# Altium PCB WES0012-02_ASCII.PcbDoc
Units mil, origin at the board's own origin, x right, y up, seen from the top; angles counter-clockwise.
Board outline 1614.17 x 1751.97 mil, 4 copper layers (Top, Inner2, Inner3, Bottom), stack 35.4 mil thick; 42 components, 32 nets, 189 pads, 344 vias.
Unrouted connection lines stored in the file: 322.
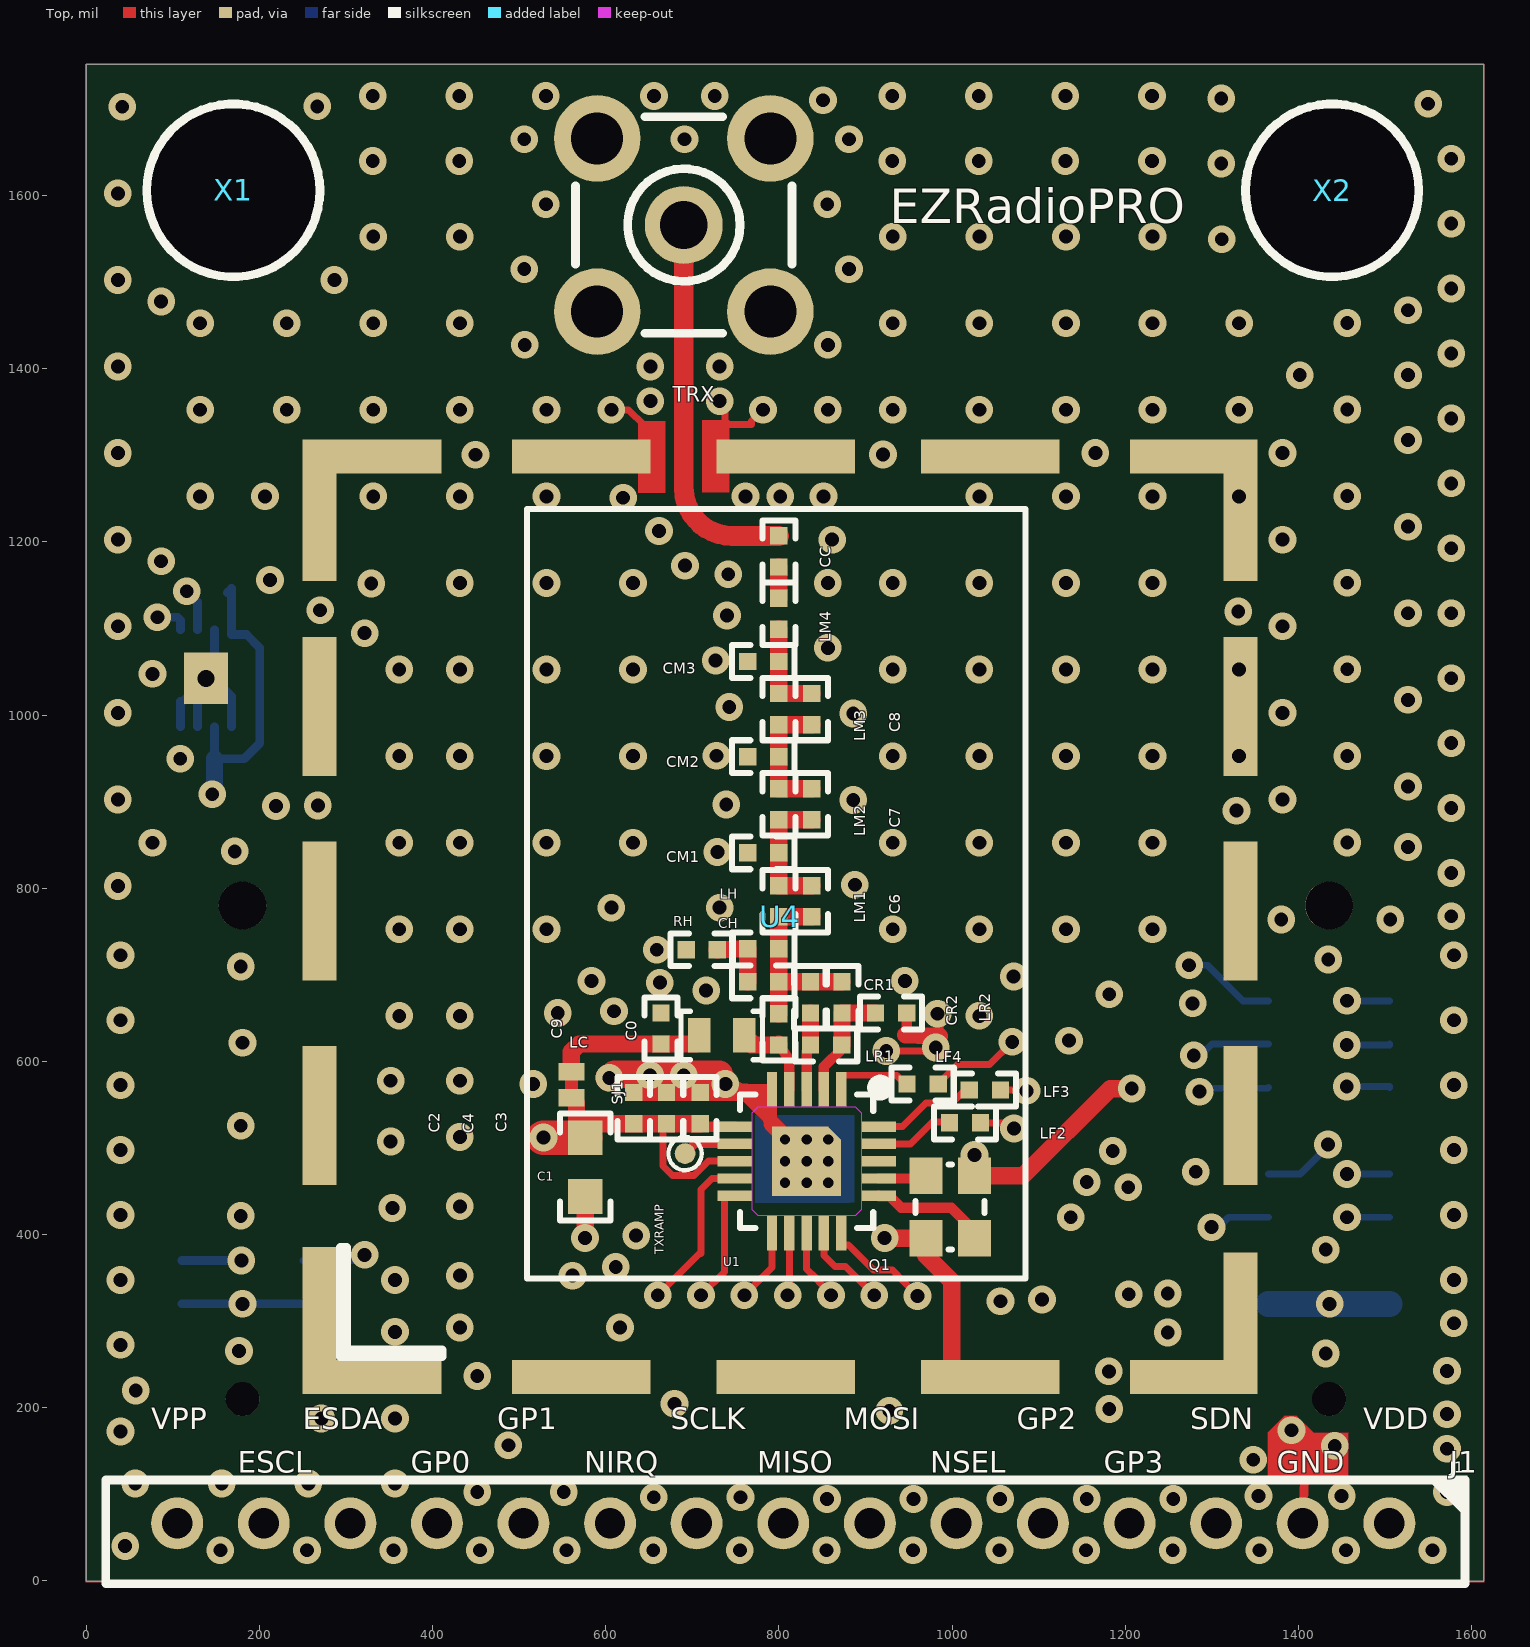
[diagram p0: Top view]
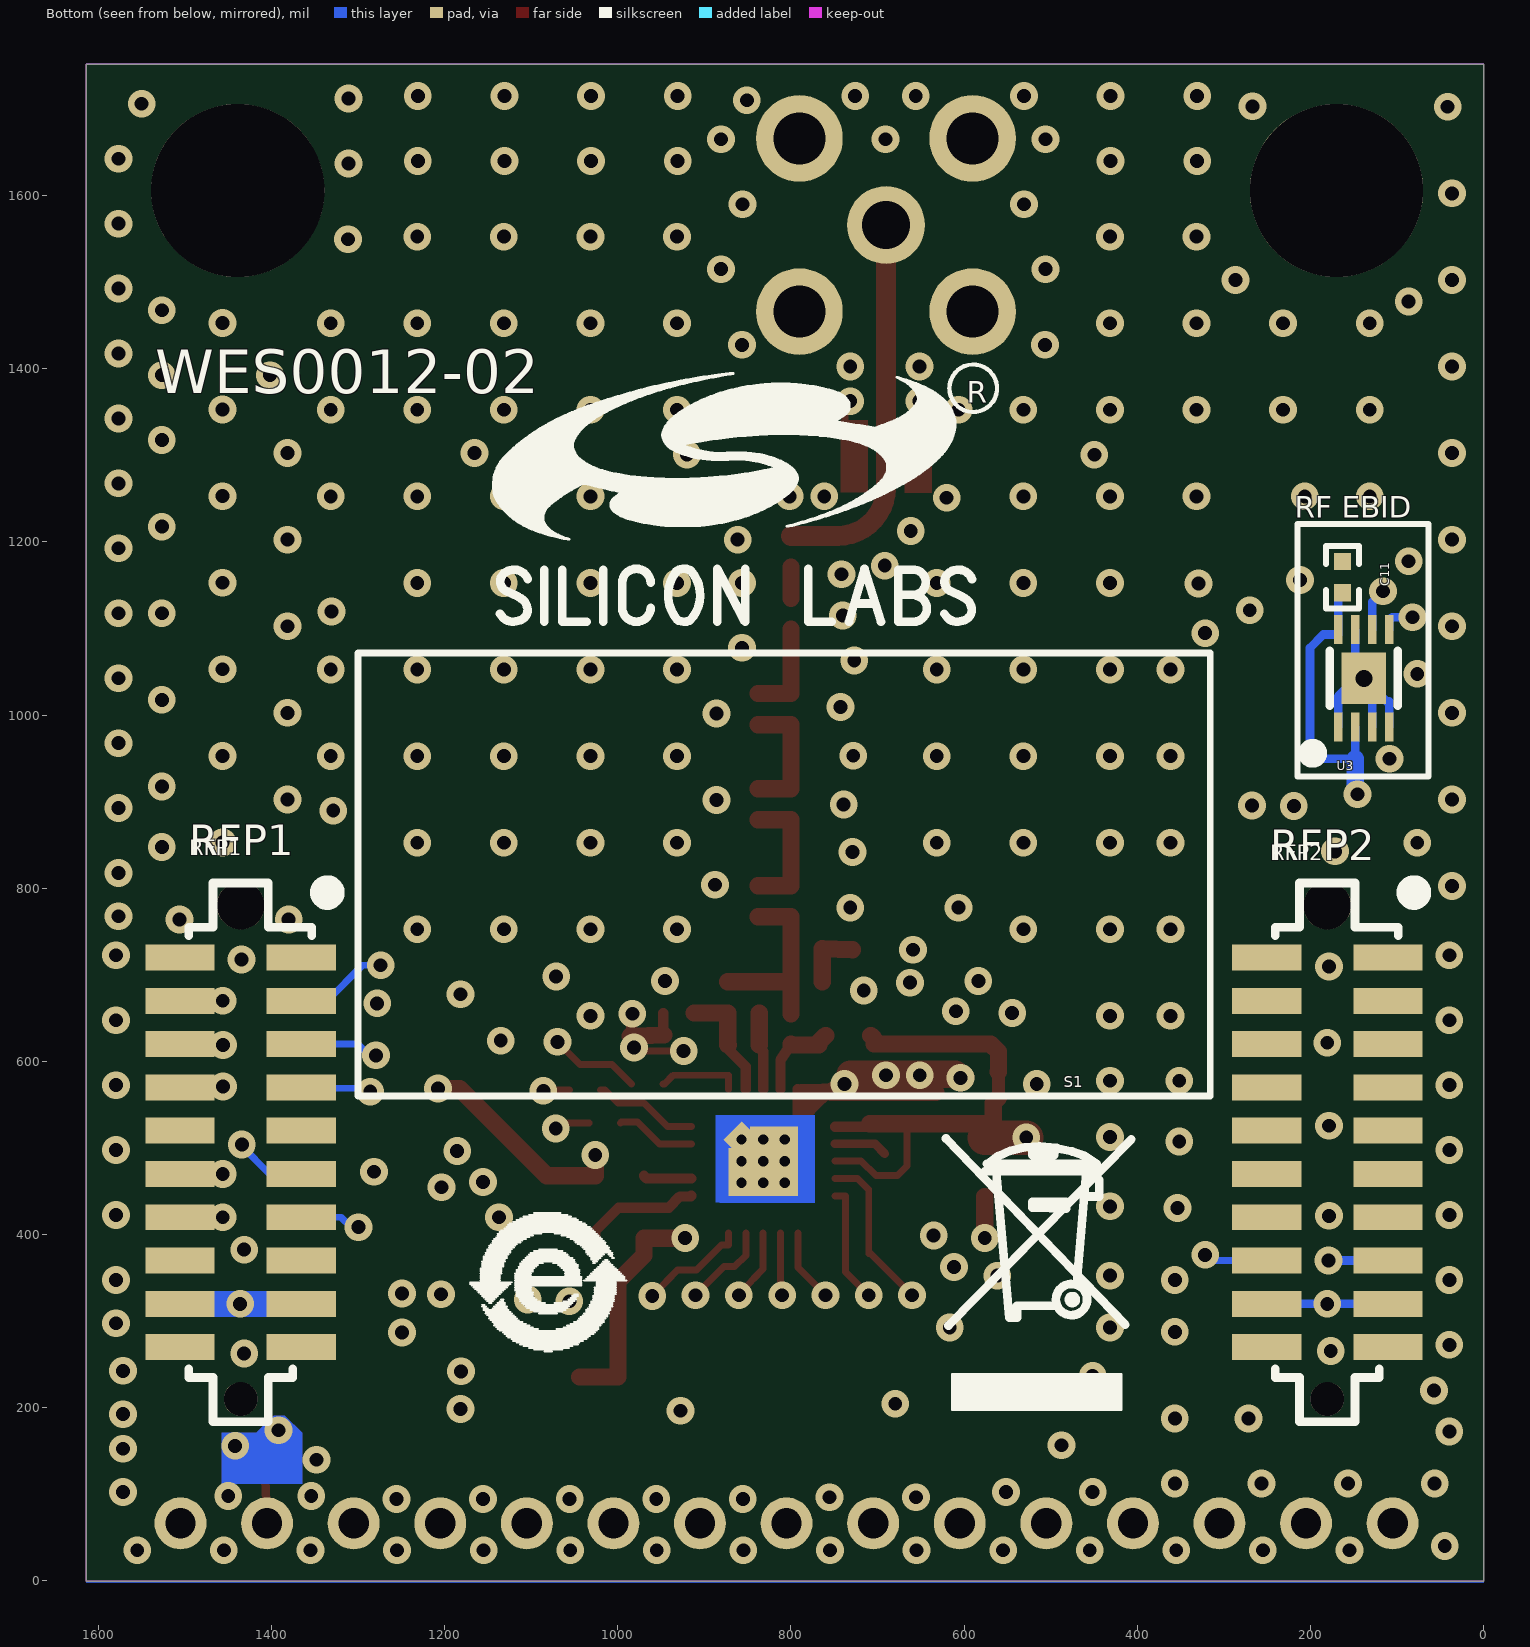
[diagram p1: Bottom view, seen from below]
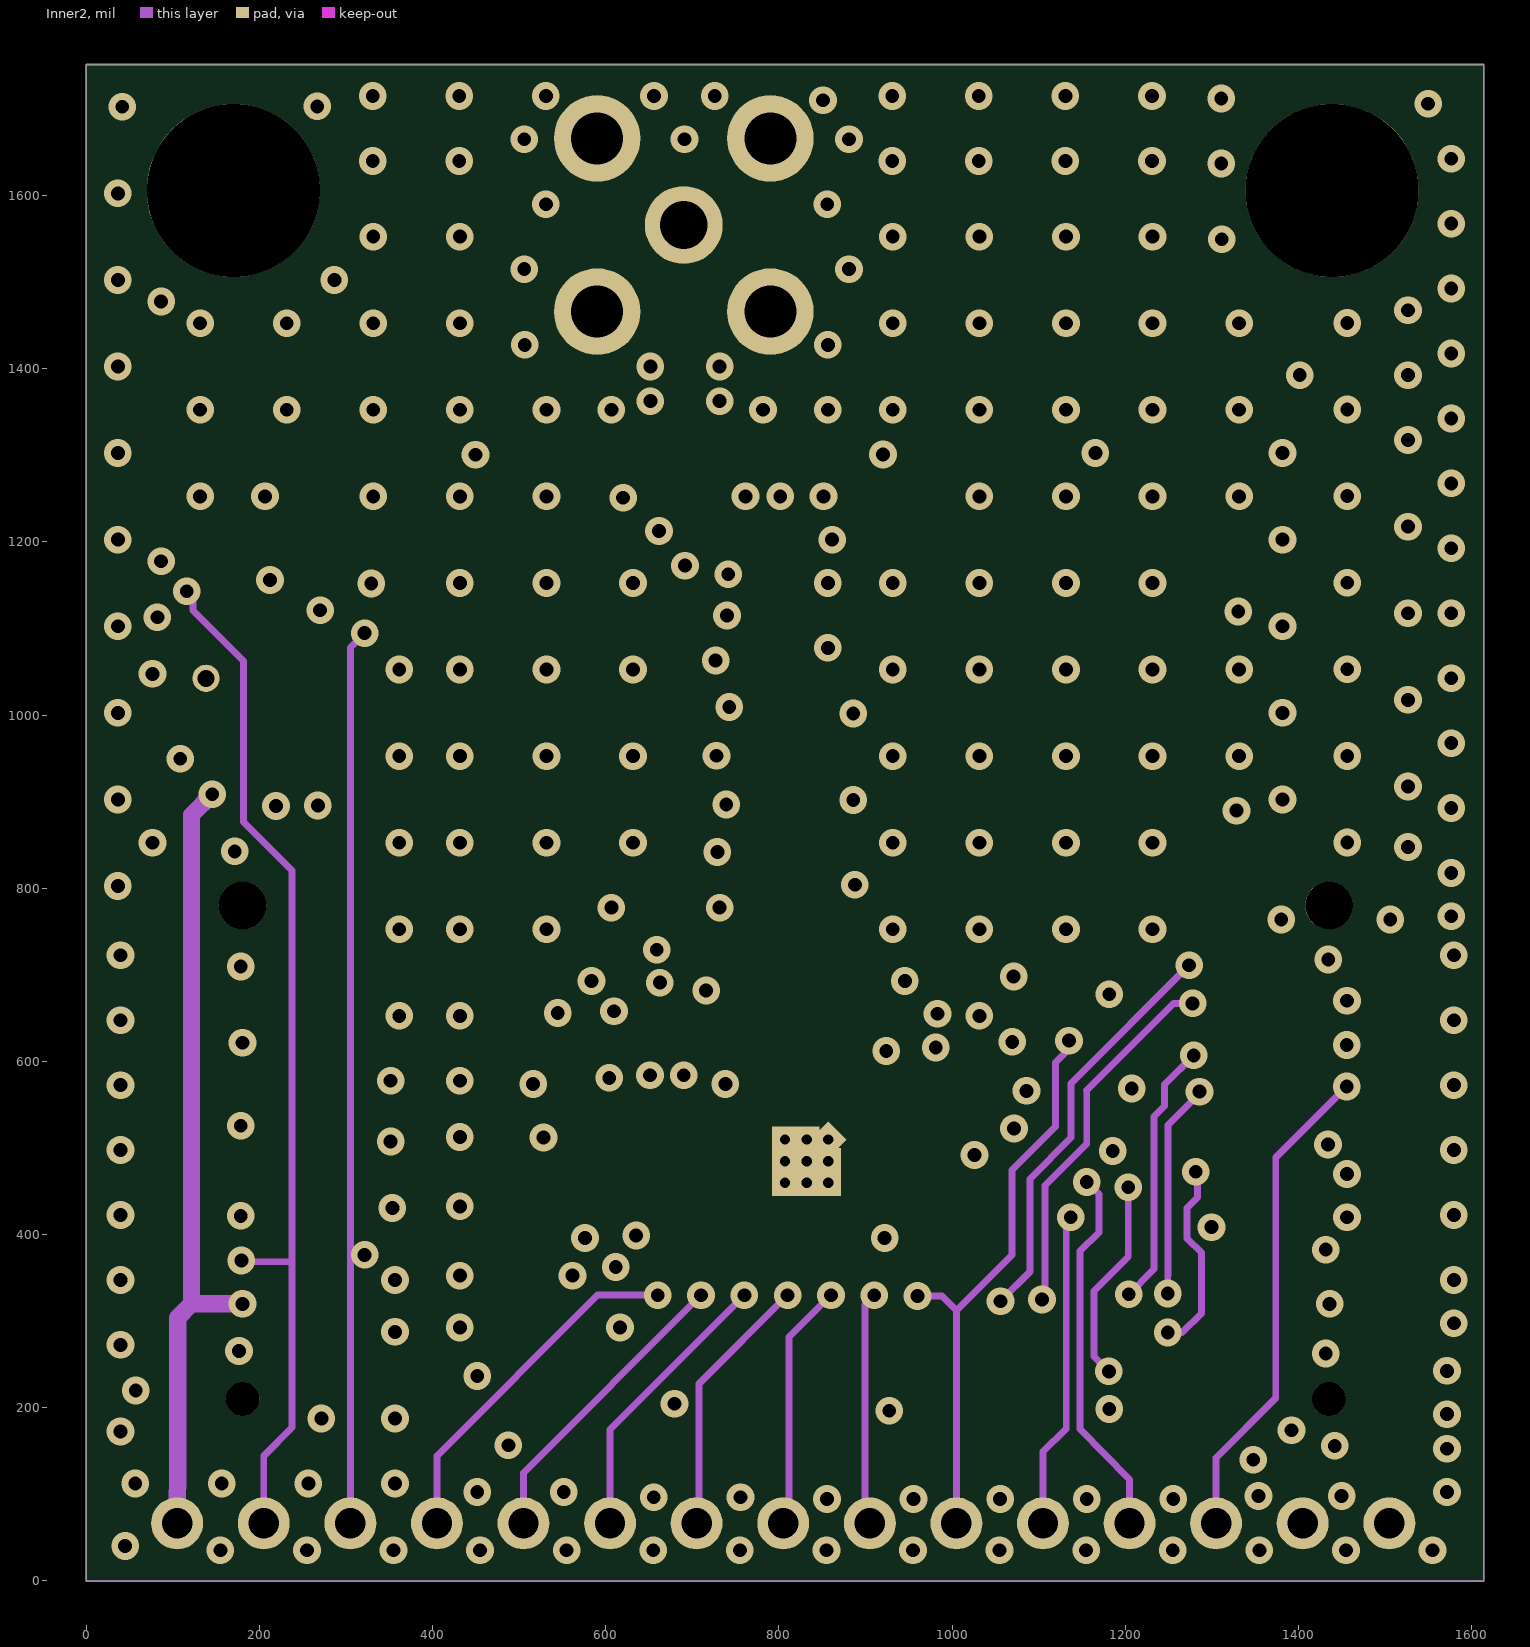
[diagram p2: Inner2]
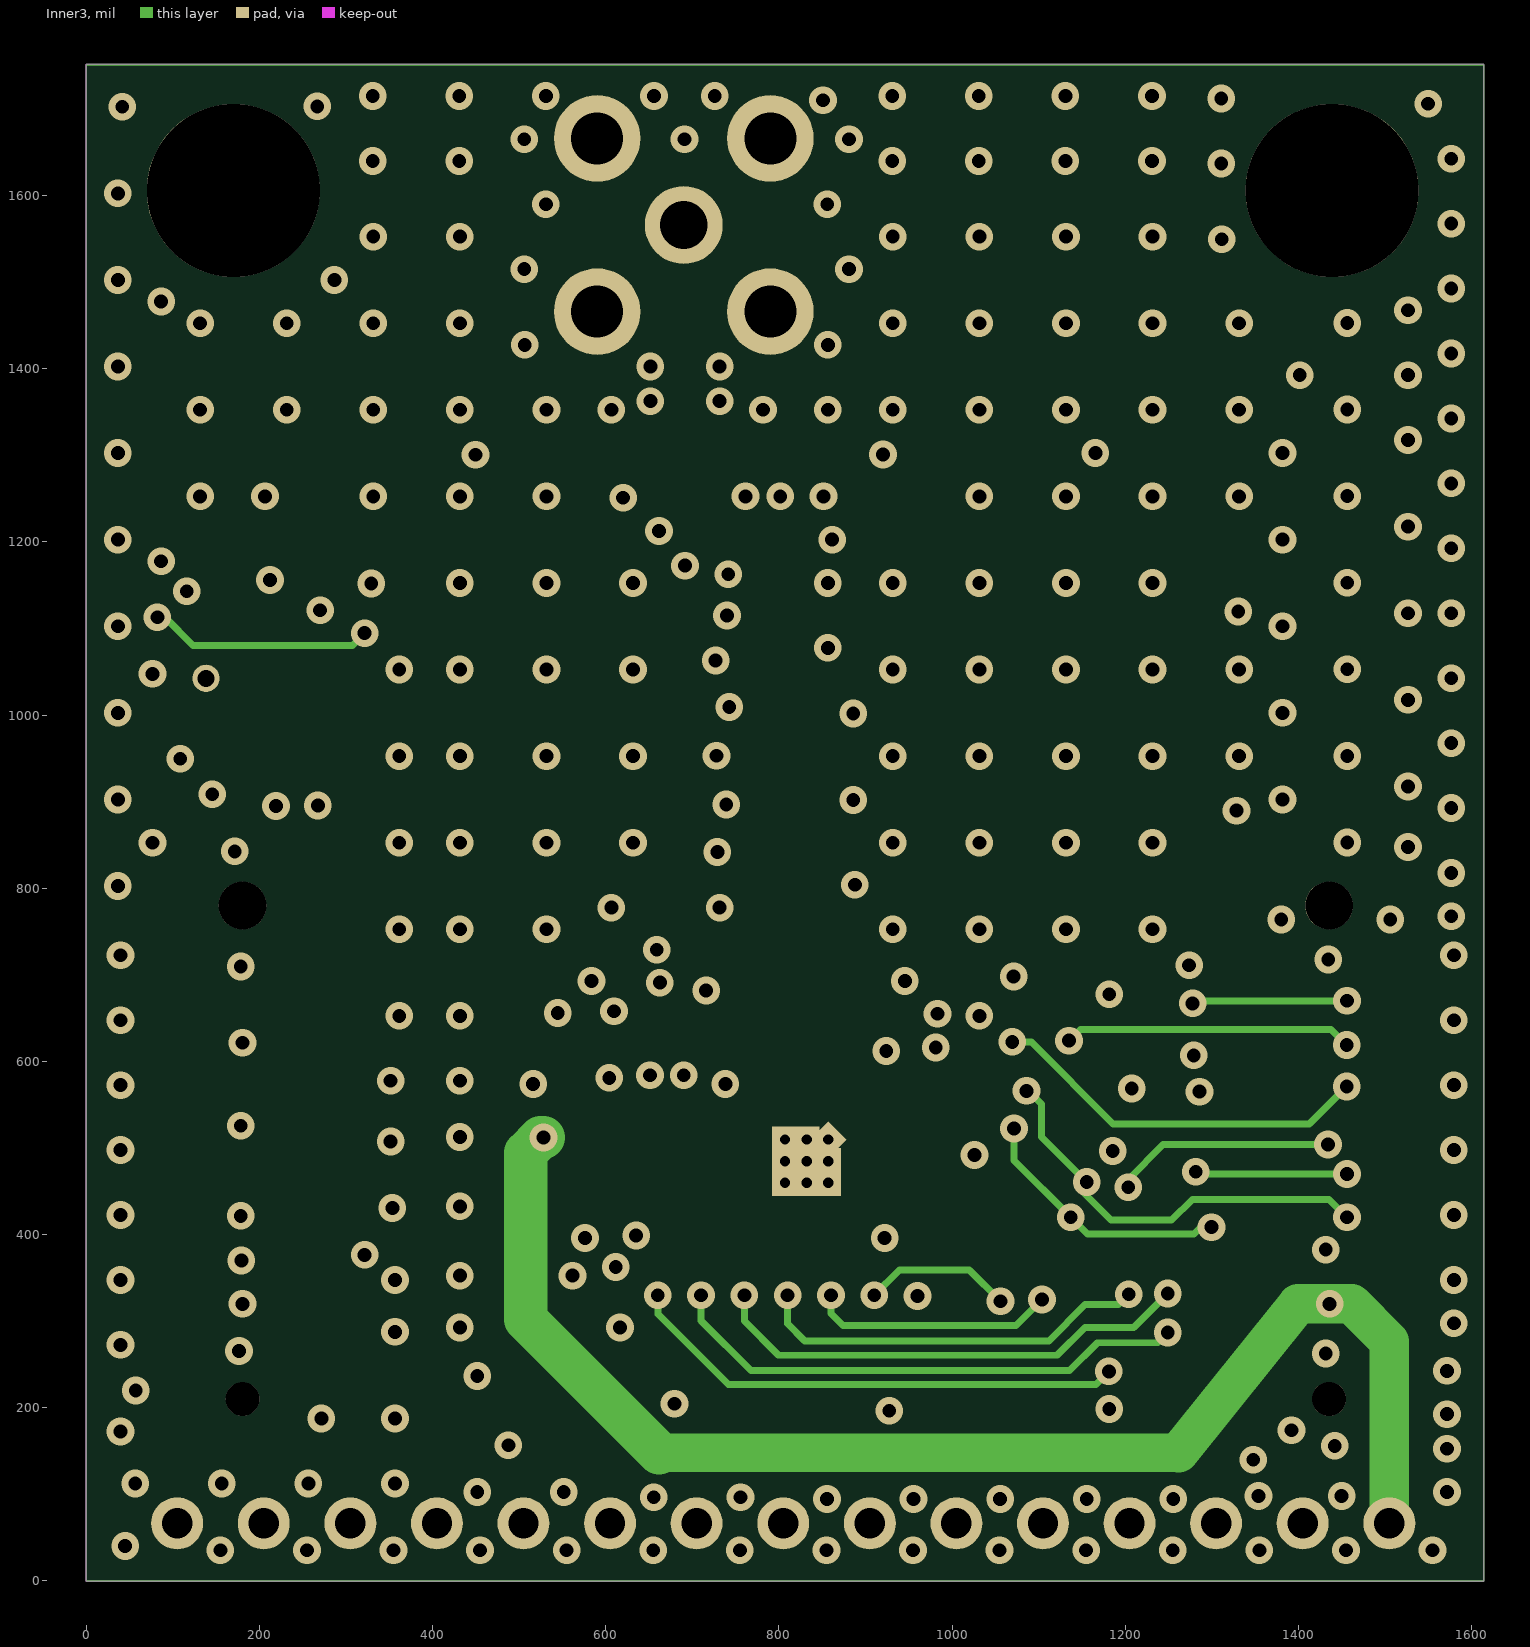
[diagram p3: Inner3]

## Layer stack, top to bottom
Solder Mask Top: solder mask 0.4, Solder Resist, Dk 3.5
Top: signal copper 1.35
Dielectric 1: dielectric 10, FR-4, Dk 4.3
Inner2: signal copper 1.35
Dielectric2: dielectric 10, FR-4, Dk 4.3
Inner3: signal copper 1.35
Dielectric3: dielectric 10, FR-4, Dk 4.3
Bottom: signal copper 1.35
Solder Mask Bottom: solder mask 0.4, Solder Resist, Dk 3.5

## Board outline
-0.09,-0.12 -0.09,1751.85 1614.09,1751.85 1614.09,-0.12

## Design rules (kind name [scope] priority, off if disabled: settings)
Clearance "Clearance - NetClass - 50OHM- SMD" [InNetClass('50OHM') AND IsVia vs IsSMTPin] p1: gap=10 ignorepadtopadclearanceinfootprint=FALSE
Clearance "Clearance - NetClass - 50OHM - Via" [InNetClass('50OHM') And IsVia vs IsVia] p2: gap=10 ignorepadtopadclearanceinfootprint=FALSE
Clearance "Clearance - NetClass - 50OHM" [InNetClass('50OHM')] p3: gap=10 ignorepadtopadclearanceinfootprint=FALSE except(0: Arc-Hole Track-Hole SMDPad-Hole THPad-Hole Via-Hole Fill-Hole Poly-Hole Region-Hole Text-Hole; 20: Arc-Fill Arc-Poly Arc-Region Track-Fill Track-Poly Track-Region SMDPad-Fill SMDPad-Poly SMDPad-Region THPad-Fill THPad-Poly THPad-Region Via-Fill Via-Poly Via-Region)
Clearance "Clearance - Default - DEFAULT- SMD" [IsVia vs IsSMTPin] p4: gap=8 ignorepadtopadclearanceinfootprint=FALSE
Clearance "Clearance - Default - DEFAULT - Via" [IsVia vs IsVia] p5: gap=8 ignorepadtopadclearanceinfootprint=FALSE
Clearance "Clearance - Default - DEFAULT - Net" [All] p6: gap=8 ignorepadtopadclearanceinfootprint=FALSE except(0: Arc-Hole Track-Hole SMDPad-Hole THPad-Hole Via-Hole Fill-Hole Poly-Hole Region-Hole Text-Hole; 10: Fill-Fill Fill-Poly Fill-Region Poly-Poly Poly-Region Region-Region Text-Text)
ComponentClearance "ComponentClearance - Default - DEFAULT" [All] p1: gap=10 collisioncheckmode=3 verticalgap=10 showdistances=FALSE
ComponentClearance "ComponentClearance - Default - " [All] p2: gap=10 collisioncheckmode=3 verticalgap=10 showdistances=FALSE
FanoutControl Fanout_SOIC [IsSOIC] p1: bgadir=Out bgaviamode=Centered fanoutstyle=Auto fanoutdirection=Alternating viagrid=1 // Fanout_SOIC (Default Rule)
FanoutControl Fanout_Small [(CompPinCount < 5)] p2: bgadir=Out bgaviamode=Centered fanoutstyle=Auto fanoutdirection=OutThenIn viagrid=1 // Fanout_Small (Default Rule)
FanoutControl Fanout_LCC [IsLCC] p3: bgadir=Out bgaviamode=Centered fanoutstyle=Auto fanoutdirection=Alternating viagrid=1 // Fanout_LCC (Default Rule)
FanoutControl Fanout_BGA [IsBGA] p4: bgadir=Out bgaviamode=Centered fanoutstyle=Auto fanoutdirection=Alternating viagrid=1 // Fanout_BGA (Default Rule)
HoleToHoleClearance "HoleToHoleClearance - Default - DEFAULT" [All] p1: gap=10 allowstackedmicrovias=TRUE
Length "Default Length" [All] p1: maxlimit=50000 minlimit=0
MaxMinImpedance "Default Impedance" [All] p1: minimum=50.00 maximum=150.0
ParallelSegment "Default Parallel Segment Adjasent" [All] p1: limit=1000 gap=200
ParallelSegment "Default Parallel Segment Same Layer" [All] p2: limit=1000 gap=200
PlaneConnect "Default PlaneConnect" [All] p1: planeconnectstyle=Relief reliefexpansion=20 reliefentries=4 reliefconductorwidth=16 reliefairgap=10
PolygonConnect "PolygonConnect - Default SMT" [IsSMTPin] p1: connectstyle=Relief reliefconductorwidth=12 reliefentries=4 polygonreliefangle="90 Angle" airgapwidth=10
PolygonConnect "PolygonConnect - Default Pad" [All] p2: connectstyle=Relief reliefconductorwidth=16 reliefentries=4 polygonreliefangle="45 Angle" airgapwidth=10
RoutingLayers "RoutingLayers - Default - DEFAULT" [All] p1: top layer_v5=TRUE mid layer 1_v5=TRUE mid layer 2_v5=TRUE bottom layer_v5=TRUE
RoutingPriority "RoutingPriority - Default - DEFAULT" [All] p1: routingpriority=3
RoutingTopology "Default Routing Topology" [All] p1: topology=Shortest
RoutingVias "RoutingVias - Default - DEFAULT" [All] p1: holewidth=24 width=40 viastyle="Through Hole" minholewidth=24 minwidth=40 maxholewidth=24 maxwidth=40
SMDToCorner "SMDToCorner - NetClass - 50OHM" [InNetClass('50OHM')] p1: distance=100000
SMDToCorner "SMDToCorner - Default - DEFAULT" [All] p2: distance=80000
SolderMaskExpansion "SolderMaskExpansion from CAM settings" [All] p1: expansion=2 istentingtop=FALSE
Width "Width - NetClass - 50OHM" [InNetClass('50OHM')] p1: maxlimit=50 minlimit=8 preferedwidth=10
Width "Default Width" [All] p2: maxlimit=50 minlimit=8 preferedwidth=10
Width "Default Width_1" [All] p3: maxlimit=50 minlimit=8 preferedwidth=8
18 further rules are at their usual default settings.

## Classes and differential pairs
net class 50OHM: RXN RXP TRX2 TX1 TX3 TX4 TX6

## Components (designator, comment, footprint, x,y, rotation, side; value= is the part's Value field where it differs from the comment)
C0 "SMD0402" SMD0402 799.99,636.96 r270 top
C1 "SMD0603" SMD0603 576.35,478.01 r90 top
C2 "SMD0402" SMD0402 632.44,546.04 r270 top
C3 "SMD0402" SMD0402 709.07,546.07 r270 top
C4 "SMD0402" SMD0402 670.27,546.04 r270 top
C6 "SMD0402" SMD0402 837.99,784.96 r270 top
C7 "SMD0402" SMD0402 837.99,896.96 r270 top
C8 "SMD0402" SMD0402 837.99,1006.96 r270 top
C9 "SMD0402" SMD0402 664,638 r270 top
C11 "SMD0402" SMD0402 162.95,1159.33 r270 bottom
CC "SMD0402" SMD0402 799.99,1188.96 r90 top
CH "SMD0402" SMD0402 781.99,691.96 r0 top
CM1 "SMD0402" SMD0402 781.99,840.96 r0 top
CM2 "SMD0402" SMD0402 781.99,951.96 r0 top
CM3 "SMD0402" SMD0402 781.99,1061.96 r0 top
CR1 "SMD0402" SMD0402 929.56,655.94 r180 top
CR2 "SMD0402" SMD0402 836.56,673.94 r270 top
J1 "PIN15_2.54MM_SPEC" PIN15_2.54MM_SPEC 1505.07,66.55 r180 top
LC "IND0603" IND0603 734,630 r180 top
LF2 "SMD0402" SMD0402 1015,529 r0 top
LF3 "SMD0402" SMD0402 1038,567 r0 top
LF4 "SMD0402" SMD0402 966,574 r0 top
LH "SMD0402" SMD0402 781.99,729.96 r0 top
LM1 "SMD0402" SMD0402 799.99,784.96 r270 top
LM2 "SMD0402" SMD0402 799.99,896.96 r270 top
LM3 "SMD0402" SMD0402 799.99,1006.96 r270 top
LM4 "SMD0402" SMD0402 799.99,1116.96 r270 top
LR1 "SMD0402" SMD0402 854.56,618.94 r0 top
LR2 "SMD0402" SMD0402 872.99,673.96 r270 top
Q1 "CRYSTAL_4PIN_SMD_2.5X2MM" CRYSTAL_4PIN_SMD_2.5X2MM 997.76,431.92 r270 top
RFP1 "SFH31-NPPB-D10-SP_ASSYMETRIC" SFH31-NPPB-D10-SP_ASSYMETRIC 1435.57,495 r270 bottom
RFP2 "SFH31-NPPB-D10-SP_ASSYMETRIC" SFH31-NPPB-D10-SP_ASSYMETRIC 180.57,495 r270 bottom
RH "SMD0402" SMD0402 710.99,728.96 r0 top
S1 "PCB_STICKER_13X25MM" PCB_STICKER_13X25MM 1300,560 r180 bottom
SJ1 "JP_SMD_2P_20X30_SHORT" JP_SMD_2P_20X30_SHORT 560.56,572.94 r270 top
TRX "SMA-V" SMA-V 690.2,1566 r0 top
TXRAMP "TESTPOINT_24" TESTPOINT_24 691.7,493.5 r0 top
U1 "QFN-20" QFN-20 832.07,484.75 r270 top
U3 "DFN-8_2X3MM" DFN-8_2X3MM 138.39,1042.48 r90 bottom
U4 "SHIELD_BMI-S-203-F" SHIELD_BMI-S-203-F 269.7,235.5 r0 top
X1 "MTHOLE2" MTHOLE2 169.99,1605.96 r0 top
X2 "MTHOLE2" MTHOLE2 1438.99,1605.96 r0 top

## Footprints (in the part's own frame and the unit in brackets; to place one, negate y for a bottom-side part, rotate by r counter-clockwise, add the part's x,y. Pads: shape width x height; smd on the part's side, far side on the other; paste and mask are expansions set on the pad)
CRYSTAL_4PIN_SMD_2.5X2MM [mil]
  rect 42x38 smd: 1(-36,-28) 2(36,-28) 3(36,28) 4(-36,28)
  silkscreen extent -49,-40 49,40
DFN-8_2X3MM [mm]
  rect 0.85x0.25 smd: 1(-1.425,0.75) 2(-1.425,0.25) 3(-1.425,-0.25) 4(-1.425,-0.75) 5(1.425,-0.75) 6(1.425,-0.25) 7(1.425,0.25) 8(1.425,0.75)
  rect 1.5x1.3 / inner round 0.8 / far side rect 1.5x1.3 hole 0.5: 9(0,0)
  silkscreen extent -2.37,-1 0.8,1.67
IND0603 [mil]
  rect 26x40 smd paste-5 mask+4: 1(-26,0) 2(26,0)
  silkscreen extent -47,-28 47,28
JP_SMD_2P_20X30_SHORT [mil]
  rect 20x30 smd paste-15: 1(-15,0) 2(15,0)
  Top lines w15: 10,0 -15,0
MTHOLE2 [mil]
  round 200 hole 200 unplated: 1(0,0)
  silkscreen extent -100,-100 100,100
PCB_STICKER_13X25MM [mil]
  silkscreen extent 0,0 984,512
PIN15_2.54MM_SPEC [mil]
  round 60 hole 35: 1(0,0) 2(100,0) 3(200,0) 4(300,0) 5(400,0) 6(500,0) 7(600,0) 8(700,0) 9(800,0) 10(900,0) 11(1000,0) 12(1100,0) 13(1200,0) 14(1300,0) 15(1400,0)
  silkscreen extent -90,-55 1482,70
QFN-20 [mil]
  rect 40x12 smd: 1(-83,40) 2(-83,20) 3(-83,0) 4(-83,-20) 5(-83,-40) 11(83,-40) 12(83,-20) 13(83,0) 14(83,20) 15(83,40)
  rect 12x40 smd: 6(-40,-83) 7(-20,-83) 8(0,-83) 9(20,-83) 10(40,-83) 16(40,83) 17(20,83) 18(0,83) 19(-20,83) 20(-40,83)
  round 30 / inner rect 30x30 / far side rect 30x30 hole 12: EP(0,0)
  rrect0% 21x21 / inner rect 30x30 / far side rect 30x30 hole 12 rot 45: EP2(-25,25)
  rect 50x30 / inner rect 30x30 / far side rect 30x30 hole 12: EP3(0,25)
  rect 30x30 hole 12: EP4(25,25) EP6(25,0) EP7(-25,-25) EP8(0,-25) EP9(25,-25)
  rect 30x50 / inner rect 30x30 / far side rect 30x30 hole 12: EP5(-25,0)
  Top keep-out region: -56,63 56,63 63,56 63,-56 56,-63 -56,-63 -63,-56 -63,56 -56,63
  silkscreen extent -92,-77 77,92
SFH31-NPPB-D10-SP_ASSYMETRIC [mil]
  rect 30x80 smd: 1(-225,70) 2(-225,-70) 3(-175,70) 4(-175,-70) 5(-125,70) 6(-125,-70) 7(-75,70) 8(-75,-70) 9(-25,70) 10(-25,-70) 11(25,70) 12(25,-70) 13(75,70) 14(75,-70) 15(125,70) 16(125,-70) 17(175,70) 18(175,-70) 19(225,70) 20(225,-70)
  round 55 hole 55 unplated: 21(-285,0)
  round 39 hole 39 unplated: 22(285,0)
  silkscreen extent -311,-60 311,110
SHIELD_BMI-S-203-F [mm]
  rect 4.07x1 smd: GND0(1.535,0) GND1(7.67,0) GND2(13.67,0) GND3(19.67,0) GND11(19.67,27.01) GND12(13.67,27.01) GND13(7.67,27.01) GND14(1.535,27.01)
  rect 3.74x1 smd: GND4(25.64,0) GND10(25.64,27.01)
  rect 1x4.07 smd: GND5(27.01,1.62) GND6(27.01,7.67) GND7(27.01,13.67) GND8(27.01,19.67) GND9(27.01,25.39) GND15(0,25.39) GND16(0,19.67) GND17(0,13.67) GND18(0,7.67) GND19(0,1.785)
  silkscreen extent 0.6,0.6 3.6,3.8
SMA-V [mil]
  round 90 hole 55: 1(0,0)
  round 100 hole 60: 2(-100,100) 3(100,100) 4(100,-100) 5(-100,-100)
  silkscreen extent -125,-125 125,125
SMD0402 [mil]
  rect 20x20 smd: 1(-18,0) 2(18,0)
  silkscreen extent -36,-19 36,19
SMD0603 [mil]
  rect 40x40 smd: 1(-34,0) 2(34,0)
  silkscreen extent -62,-29 62,29
TESTPOINT_24 [mil]
  round 24 smd: 1(0,0)
  silkscreen extent -19,-19 19,19

## Via types
v1: diameter 32, hole 16, Top to Bottom, 344 vias

## Nets (pads, with @x,y where several pads share a name; then routed paths per layer and width w, separated by ;. In a path a pad name is that pad's centre, name@x,y a point inside that pad or via, vN(x,y) a via of type N, cw(c..) or ccw(c..) an arc to the next point about the centre after c; other vN are vias at no path point)
$$$6546: TXRAMP.1 U1.7 | length 62
  Top w10: TXRAMP.1 702.95,504.75 U1.7
$$$7296: CC.2 TRX.1 | length 444.9
  Top w23: TRX.1 690.2,1335.6 690.2,1261.96 ccw(c745.99,1262.76) 745.99,1206.96 CC.2
$$$10983: CH.1 LH.1 RH.2 | length 73
  Top w20: RH.2 LH.1 CH.1
$$$11456: Q1.3 U1.16 | length 135.9
  Top w12: U1.16 915.82,444 928.2,444 941.2,431 999.2,431 1025.76,404.44 Q1.3
$$$11466: Q1.1 U1.17 | length 56
  Top w12: U1.17 966.59,464.75 Q1.1
$$$30978: LF4.1 U1.1 | length 96.3
  Top w8: U1.1 872.07,584 936,584 946,574 LF4.1
$$$30982: LF3.1 U1.20 | length 122.4
  Top w8: U1.20 942.75,524.75 970,552 1000,552 1015,567 LF3.1
$$$30984: LF2.1 U1.19 | length 92.8
  Top w8: U1.19 952,504.75 977.25,530 996,530 LF2.1
EBID_SCL: J1.14 RFP2.15 U3.6 | length 1317.4
  Inner2 w8: v1(116.2,1143) 123.6,1135.6 123.6,1120.6 181.6,1062.6 181.6,876.6 237.6,820.6 237.6,368.6 ; v1(179.2,370) 190.2,370 191.6,368.6 237.6,368.6 ; J1.14 205.07,144.5 237.6,177.03 237.6,368.6
  Bottom w10: RFP2.15 v1(179.2,370) ; v1(116.2,1143) 128.6,1130.6 U3.6 U3.6
EBID_SDA: J1.13 RFP2.16 U3.5 | length 1423
  Inner2 w8: J1.13 305.07,376.6 ; v1(321.6,376.6) 305.07,376.6 ; v1(321.6,1094.6) 305.07,1078.07 305.07,376.6
  Inner3 w8: v1(82.2,1113) 91.2,1113 123.6,1080.6 307.6,1080.6 v1(321.6,1094.6)
  Bottom w8: RFP2.16 309.6,370 316.2,376.6 v1(321.6,376.6)
  Bottom w10: v1(82.2,1113) 105.53,1113 108.86,1109.67 U3.5
GND: C1.1 C2.1 C3.1 C4.1 C9.1 C11.1 CM1.1 CM2.1 CM3.1 CR1.1 J1.2 Q1.2 Q1.4 RFP1.1 RFP1.2 RFP1.19 RFP1.20 RFP2.1 RFP2.2 RFP2.19 RFP2.20 RH.1 TRX.2 TRX.3 TRX.4 TRX.5 U1.5 U1.EP U1.EP2 U1.EP3 U1.EP4 U1.EP5 U1.EP6 U1.EP7 U1.EP8 U1.EP9 U3.1 U3.3 U3.4 U3.7 U3.9 U4.GND0 U4.GND1 U4.GND2 U4.GND3 U4.GND4 U4.GND5 U4.GND6 U4.GND7 U4.GND8 U4.GND9 U4.GND10 U4.GND11 U4.GND12 U4.GND13 U4.GND14 U4.GND15 U4.GND16 U4.GND17 U4.GND18 U4.GND19 | length 1900.3
  Top w8: v1(606.6,1352.6) 626.6,1352.6 644.6,1334.6 ; 716.6,1335.6 768.6,1335.6 768.6,1339.6 v1(781.6,1352.6) ; v1(731.6,1362.6) 736.7,1362.6 737.6,1361.7 737.6,1335.6 ; v1@745.95,572.07 753.49,564.54 753.95,564.07 773.17,544.85 776.42,541.6 777.1,540.92 788.63,529.39 790.02,528 805.02,513 807.07,510.95 808.27,509.75 832.07,485.95 U1.EP ; v1(924,612) 979.6,612 v1(981.2,616)
  Top w10: v1@731.2,585 733.02,585 v1@745.95,572.07 ; U1.5@786.96,564.07 790.64,567.75 U1.5 ; J1.2 1407.2,116.94 1408.51,147.94 1421.56,147.94 1452.56,116.94
  Top w12: 792.07,528 792.07,529.39 792.07,540.92 792.07,541.6 792.07,544.85 792.07,546.57 792.07,547.75 792.07,564.07 U1.5 ; 946.68,630.41 947.56,631.29 CR1.1 ; v1(983.2,655) 983.2,651.94 v1@985.56,628.94
  Top w16: v1@745.95,572.07 759.6,564.6 759.66,564.54 760.13,564.07 775.6,548.6 777.3,547.75 777.6,547.6 778.63,546.57 780.35,544.85 783.6,541.6 ; 780.54,564.07 780.54,547.75 780.54,546.57 781.6,544.85 783.6,541.6 ; U1.EP7 807.07,510.95 807.07,513 807.07,514.39 792.07,529.39 784.07,540.92 783.6,541.6
  Top w20: v1(576.2,396) 576.35,396.15 C1.1 ; C2.1 C4.1 652.3,564.07 C3.1 753.49,564.54 759.6,564.6 762.13,564.54 780.54,564.07 U1.5@786.96,564.07 ; 792.07,528 U1.EP7@807.07,513 ; v1(922.2,396) 922.28,395.92 Q1.2 969.76,376 999.76,346 999.76,235.5 U4.GND3 ; 946.68,630.41 v1@985.56,628.94 ; v1(1026,492) 1025.76,492 Q1.4 1082,467.92 1182.68,568.6 v1(1207.6,568.6)
  Top w32: v1(604.2,581) 610.2,585 v1@731.2,585
  Bottom w10: U3.4 108.86,1015.6 111.51,1015.6 U3.9@128.55,1032.64 ; U3.3 U3.9@128.55,1032.64 ; U3.7 148.23,1052.32 U3.9 ; U3.1 167.92,1021.6 147.04,1042.48 U3.9 ; U3.9@128.55,1032.64 128.55,1035.6 U3.9@131.51,1035.6 ; U3.9@128.55,1032.64 U3.9@131.51,1035.6 ; U3.9@131.51,1035.6 U3.9
  other v1: 154.95,35.31 254.95,35.31 354.95,35.31 454.95,35.31 554.95,35.31 654.95,35.31 754.95,35.31 854.95,35.31 954.95,35.31 1054.95,35.31 1154.95,35.31 1254.95,35.31 1354.95,35.31 1454.95,35.31 1554.95,35.31 44.95,40.31 855.6,94.6 955.6,94.6 1055.6,94.6 1155.6,94.6 1255.6,94.6 655.6,96.6 755.6,96.6 1354,98 1450,98 451.6,102.6 551.6,102.6 1571.6,102.6 56.6,112.6 156.6,112.6 256.6,112.6 356.6,112.6 1348,140 1571.6,152.6 1442,156 487.6,156.6 39.6,172.6 1392,174 271.6,187.6 356.6,187.6 1571.6,192.6 927.6,196.6 1181.6,198.6 679.6,204.6 57.2,220 451.6,236.6 1571.6,242.6 1431.6,262.6 176.6,265.6 39.6,272.6 356.6,287.6 431.6,292.6 616.6,292.6 1579.6,297.6 39.6,347.6 356.6,347.6 1579.6,347.6 431.6,352.6 561.6,352.6 611.6,362.6 1431.6,382.6 635.2,399 178.6,421.6 39.6,422.6 1579.6,422.6 353.6,430.6 431.6,432.6 1185.6,496.6 39.6,497.6 1579.6,497.6 351.6,507.6 431.6,512.6 178.6,525.6 39.6,572.6 1579.6,572.6 516.2,574 738.2,574 351.6,577.6 431.6,577.6 651.2,584 690.2,584 180.6,621.6 39.6,647.6 1579.6,647.6 361.6,652.6 431.6,652.6 1031.6,652.6 544.56,655.94 609.56,657.94 1181.6,677.6 716,682 662.56,690.94 583.56,692.94 945.56,692.94 1071.2,698 178.6,709.6 1434.6,717.6 39.6,722.6 1579.6,722.6 658.99,728.96 361.6,752.6 431.6,752.6 531.6,752.6 931.6,752.6 1031.6,752.6 1131.6,752.6 1231.6,752.6 1380.2,764 1506.2,764 1576.6,767.6 606.6,777.6 731.6,777.6 36.6,802.6 887.8,804 1576.6,817.6 728.99,841.96 171.6,842.6 1526.6,847.6 76.6,852.6 361.6,852.6 431.6,852.6 531.6,852.6 631.6,852.6 931.6,852.6 1031.6,852.6 1131.6,852.6 1231.6,852.6 1456.56,852.85 1328.6,889.6 1576.6,892.6 219.2,895 267.6,895.6 739.2,896.8 885.9,901.8 36.6,902.6 1381.6,902.6 1526.6,917.6 108.6,949.6 361.6,952.6 431.6,952.6 531.6,952.6 631.6,952.6 727.99,952.96 931.6,952.6 1031.6,952.6 1131.6,952.6 1231.6,952.6 1331.6,952.6 1456.56,952.85 1576.6,967.6 885.9,1001.8 36.6,1002.6 1381.6,1002.6 742.7,1009.3 1526.6,1017.6 1576.6,1042.6 76.6,1047.6 361.6,1052.6 431.6,1052.6 531.6,1052.6 631.6,1052.6 931.6,1052.6 1031.6,1052.6 1131.6,1052.6 1231.6,1052.6 1331.6,1052.6 1456.56,1052.85 726.99,1062.96 856.6,1077.6 36.6,1102.6 1381.6,1102.6 740.1,1115 1526.6,1117.6 1576.6,1117.6 1330.6,1119.6 270.2,1121 329.2,1152 431.6,1152.6 531.6,1152.6 631.6,1152.6 856.6,1152.6 931.6,1152.6 1031.6,1152.6 1131.6,1152.6 1231.6,1152.6 1456.56,1152.85 212.2,1156 741.6,1162.6 691.6,1172.6 86.6,1177.6 1576.6,1192.6 36.6,1202.6 861.6,1202.6 1381.6,1202.6 661.6,1212.6 1526.6,1217.6 620.2,1251 131.6,1252.6 206.6,1252.6 331.6,1252.6 431.6,1252.6 531.6,1252.6 761.6,1252.6 801.6,1252.6 851.6,1252.6 1031.6,1252.6 1131.6,1252.6 1231.6,1252.6 1331.6,1252.6 1456.56,1252.85 1576.6,1267.6 449.6,1300.6 920.2,1301 36.6,1302.6 1165.6,1302.6 1381.6,1302.6 1526.6,1317.6 1576.6,1342.6 131.6,1352.6 231.6,1352.6 331.6,1352.6 431.6,1352.6 531.6,1352.6 856.6,1352.6 931.6,1352.6 1031.6,1352.6 1131.6,1352.6 1231.6,1352.6 1331.6,1352.6 1456.56,1352.85 651.6,1362.6 1401.6,1392.6 1526.6,1392.6 36.6,1402.6 651.6,1402.6 731.6,1402.6 1576.6,1417.6 506.6,1427.6 856.6,1427.6 131.6,1452.6 231.6,1452.6 331.6,1452.6 431.6,1452.6 931.6,1452.6 1031.6,1452.6 1131.6,1452.6 1231.6,1452.6 1331.6,1452.6 1456.56,1452.85 1526.6,1467.6 86.6,1477.6 1576.6,1492.6 36.6,1502.6 286.6,1502.6 505.92,1515.04 880.92,1515.04 1311.6,1549.6 331.6,1552.6 431.6,1552.6 931.6,1552.6 1031.6,1552.6 1131.6,1552.6 1231.6,1552.6 1576.6,1567.6 530.92,1590.04 855.92,1590.04 36.6,1602.6 1310.92,1637.04 330.92,1640.04 430.92,1640.04 930.92,1640.04 1030.92,1640.04 1130.92,1640.04 1230.92,1640.04 1576.6,1642.6 505.92,1665.04 690.92,1665.04 880.92,1665.04 41.6,1702.6 266.92,1703.04 1549.92,1706.04 850.92,1710.04 1310.92,1712.04 330.92,1715.04 430.92,1715.04 530.92,1715.04 655.92,1715.04 725.92,1715.04 930.92,1715.04 1030.92,1715.04 1130.92,1715.04 1230.92,1715.04
RF_GPIO_0: J1.12 RFP1.11 U1.9 | length 1757.9
  Top w8: v1(660.2,330) 708.2,378 710.2,378 710.2,452.2 723,465 749.07,465 U1.9
  Inner2 w8: J1.12 405.07,144.5 590.57,330 v1(660.2,330) ; v1(1181.2,242) 1164.16,259.04 1164.16,335.04 1198.2,369.08 1203.6,374.48 1203.6,406.6 v1(1203.6,454.6)
  Inner3 w8: v1(660.2,330) 660.2,308 741.6,226.6 1166.24,226.6 v1(1181.2,242) ; v1(1203.6,454.6) 1203.6,463.68 1243.92,504 v1(1434.2,504)
  Bottom w8: RFP1.11 1402.2,470 1434.2,502 v1(1434.2,504)
RF_GPIO_1: J1.11 RFP1.12 U1.10 | length 1547
  Top w8: v1(710.2,330) 737.2,357 737.2,444.75 U1.10
  Inner2 w8: J1.11 505.07,124.87 v1(710.2,330) ; v1(1249.2,287) 1265.88,287 1287.92,309.04 1287.92,379.04 1271.6,395.36 1271.6,430.6 1283.6,442.6 1283.6,472.6 v1(1281.6,472.6)
  Inner3 w8: v1(710.2,330) 710.2,300.44 767.6,243.04 1135.92,243.04 1167.92,275.04 1237.24,275.04 v1(1249.2,287) ; v1(1281.6,472.6) 1284.2,470 v1(1456.2,470)
  Bottom w8: v1(1456.2,470) RFP1.12
RF_GPIO_2: J1.5 LF2.2 RFP1.13 | length 786.6
  Top w8: LF2.2 1058,529 1065,522 1065,523.4 1067.6,526 1068.2,526 v1(1071.6,522.6)
  Inner2 w8: J1.5 1105.07,149.31 1131.92,175.31 1131.92,414.72 v1(1137.2,420)
  Inner3 w8: v1(1071.6,522.6) 1071.6,485.6 v1(1137.2,420) 1156.6,400.6 1279.6,400.6 1287.6,408.6 v1(1299.6,408.6)
  Bottom w8: v1(1299.6,408.6) 1308.2,408.6 1319.6,420 RFP1.13
RF_GPIO_3: J1.4 LF3.2 RFP1.14 | length 1010.6
  Top w8: LF3.2 1070,567 v1(1086,566)
  Inner2 w8: v1(1155.6,460.6) 1169.6,446.6 1169.6,402.6 1147.92,380.92 1147.92,175.31 1205.07,117.31 J1.4
  Inner3 w8: v1(1086,566) 1081.6,572.6 1103.6,550.6 1103.6,512.6 v1(1155.6,460.6) 1153.6,458.6 1153.6,446.6 1183.6,416.6 1253.6,416.6 1277.6,440.6 1435.6,440.6 v1(1456.2,420)
  Bottom w8: v1(1456.2,420) RFP1.14
RF_MISO: J1.8 RFP1.4 U1.13 | length 1308.6
  Top w8: U1.13 832.07,360 843.2,349 v1(860.2,330)
  Inner2 w8: J1.8 811.92,73.4 811.92,281.72 v1(860.2,330) ; v1(1103.92,325.04) 1107.6,328.72 1107.6,456.6 1155.6,504.6 1155.6,566.16 1155.16,566.6 1255.6,667.04 v1(1277.92,667.04)
  Inner3 w8: v1(860.2,330) 860.2,308.76 873.92,295.04 1073.92,295.04 v1(1103.92,325.04) ; v1(1277.92,667.04) 1280.2,667.04 1283.16,670 v1(1456.2,670)
  Bottom w8: v1(1456.2,670) RFP1.4
RF_MOSI: J1.7 RFP1.3 U1.14 | length 1132.6
  Top w8: U1.14 852.07,376 865.07,363 877.2,363 v1(910.2,330)
  Inner2 w8: J1.7 899.6,72.02 899.6,248.6 899.6,319.4 v1(910.2,330) ; v1(1055.92,323.04) 1089.92,357.04 1089.92,464.41 1137.6,512.09 1137.6,515.83 1137.6,574.72 v1(1273.92,711.04)
  Inner3 w8: v1(910.2,330) 939.24,359.04 1019.92,359.04 v1(1055.92,323.04)
  Bottom w8: v1(1273.92,711.04) 1294.88,711.04 1335.92,670 RFP1.3
RF_NIRQ: J1.10 RFP1.7 U1.11 | length 1306.4
  Top w8: v1(760.2,330) 760.2,330.13 792.07,362 U1.11
  Inner2 w8: J1.10 605.07,174.87 v1(760.2,330) ; v1(1249.2,332) 1249.2,352.2 1249.6,352.6 1249.6,416.6 1249.6,526.6 1285.92,562.92 v1(1285.92,565.04)
  Inner3 w8: v1(760.2,330) 760.2,300 799.6,260.6 1121.48,260.6 1153.6,292.72 1209.92,292.72 v1(1249.2,332)
  Bottom w8: v1(1285.92,565.04) 1301.92,569 1364.57,569 RFP1.7
RF_NSEL: J1.6 RFP1.6 U1.15 | length 1174
  Top w8: U1.15 872.07,388 880.2,388 909.2,359 931.2,359 957.26,332.03 v1(960.2,329)
  Inner2 w8: v1(960.2,329) 988.26,329 1005.07,312.19 ; J1.6 1005.07,312.19 ; v1(1135.2,624) 1135.2,614.32 1119.48,598.6 1119.48,524.6 1069.48,474.6 1069.48,466.6 1069.48,376.6 1005.07,312.19
  Inner3 w8: v1(1135.2,624) 1148.24,637.04 1437.92,637.04 v1(1455.92,619.04)
  Bottom w8: v1(1455.92,619.04) 1505.57,619.04 RFP1.6
RF_SCLK: J1.9 RFP1.5 U1.12 | length 1235.7
  Top w8: v1(810.2,330) 810.2,336.13 812.07,338 U1.12
  Inner2 w8: J1.9 707.92,69.4 707.92,227.72 v1(810.2,330) ; v1(1204.2,331) 1231.6,358.4 1231.6,358.6 1233.2,360.2 1233.2,362.6 1233.2,400.6 1233.2,536.2 1245.6,548.6 1245.6,573.4 v1(1279.2,607)
  Inner3 w8: v1(810.2,330) 810.2,297.04 829.92,277.32 1111.92,277.32 1153.64,319.04 1192.24,319.04 v1(1204.2,331)
  Bottom w8: v1(1279.2,607) 1287.2,607 1300.2,620 RFP1.5
RF_SDN: J1.3 LF4.2 RFP1.8 | length 1167.1
  Top w8: LF4.2 1006.5,596.5 1043.5,596.5 v1(1069.6,622.6)
  Inner2 w8: J1.3 1305.07,142.19 1373.92,211.04 1373.92,489.04 v1(1455.92,571.04)
  Inner3 w8: v1(1069.6,622.6) 1091.6,622.6 1185.92,527.72 1412.6,527.72 v1(1455.92,571.04)
  Bottom w8: v1(1455.92,571.04) 1505.57,571.04 RFP1.8
RFVDD: C1.2 C2.2 C3.2 C4.2 J1.1 RFP1.17 RFP1.18 SJ1.2 U1.6 U1.8 | length 2208.5
  Top w8: C1.2 C1.2@576.35,525.39 ; C4.2@666,528.07 666,479 677,468 702,468 719,484.75 U1.8
  Top w12: C3.2@702.78,528.07 706.1,524.75 U1.6
  Top w20: SJ1.2 562.56,555.64 566.2,552 566.2,518.6 576.35,525.39 578.96,528 599.28,528 601.56,528 C2.2 C4.2 652.3,528.07 666,528.07 702.78,528.07 C3.2
  Top w40: v1(528.2,512) C1.2
  Inner3 w44: 661.6,148 1261.6,148
  Inner3 w46: 1261.6,148 1399.6,320 v1(1436.2,320) 1461.6,320 1505.07,276.53 J1.1
  Inner3 w50: v1(528.2,512) 525,512 507.6,494.6 507.6,302 661.6,148
  Bottom w30: RFP1.17 v1(1436.2,320) RFP1.18
RFVDD_TX: C9.2 LC.2 SJ1.1 | length 182.3
  Top w20: SJ1.1 560.27,588.23 560.27,611 569.2,619.93 C9.2 704,620 704,626 LC.2
RXN: CR2.2 LR1.1 U1.3 | length 89.4
  Top w12: U1.3 832.07,611.45 LR1.1
  Top w20: LR1.1 CR2.2
RXP: CR1.2 LR1.2 LR2.2 U1.2 | length 135.6
  Top w12: U1.2 852.07,593.94 872.56,613.94 LR1.2
  Top w20: LR1.2 872.99,619.37 LR2.2 CR1.2@911.54,655.96
TRX2: C8.1 CM3.2 LM3.1 LM4.2 | length 112
  Top w20: LM4.2 CM3.2 LM3.1 C8.1
TX1: C0.2 LC.1 U1.4 | length 103.1
  Top w12: C0.2@799.99,619.94 800.63,618.96 812.07,601.43 U1.4
  Top w20: LC.1 768,622 768,618.96 C0.2 C0.2@799.99,619.94
TX3: C0.1 C6.2 CH.2 CR2.1 LH.2 LM1.2 LR2.1 | length 260
  Top w20: C6.2 LM1.2 LH.2 CH.2 C0.1 800.01,691.94 CR2.1 LR2.1
TX4: C7.1 C8.2 CM2.2 LM2.1 LM3.2 | length 150
  Top w20: C7.1 LM2.1 CM2.2 799.99,955.96 LM3.2 C8.2
TX6: C6.1 C7.2 CM1.2 LM1.1 LM2.2 | length 152
  Top w20: C6.1 LM1.1 CM1.2 LM2.2 C7.2
TX7: CC.1 LM4.1 | length 36
  Top w20: LM4.1 CC.1
VPP: C11.2 J1.15 RFP2.17 RFP2.18 U3.2 U3.8 | length 1475.7
  Inner2 w20: J1.15 105.6,145.03 105.6,303.94 121.6,319.94 ; v1(145.6,908.6) 121.6,884.6 121.6,319.94 ; v1(180.56,319.94) 121.6,319.94
  Bottom w10: U3.2 148.23,949.6 182.6,949.6 200.6,967.6 200.6,1077.6 185.2,1093 167.92,1093 U3.8 167.92,1146.29 C11.2 ; v1(180.56,319.94) 110.57,319.94 RFP2.17 RFP2.18
  Bottom w20: v1(145.6,908.6) 148.23,911.23 148.23,949.6
pads on no net: RFP1.9 RFP1.10 RFP1.15 RFP1.16 RFP1.21 RFP1.22 RFP2.3 RFP2.4 RFP2.5 RFP2.6 RFP2.7 RFP2.8 RFP2.9 RFP2.10 RFP2.11 RFP2.12 RFP2.13 RFP2.14 RFP2.21 RFP2.22 U1.18 X1.1 X2.1

## Polygon pours and split planes (outlines as drawn)
GND on Top (solid, remove dead copper, pour order 0): -0.09,-1.35 -0.09,1751.6 1614.09,1751.6 1614.09,-1.35
GND on Inner2 (solid, remove dead copper, pour order 1): -0.09,0.31 -0.09,1750.64 1614.09,1750.64 1614.09,0.31
GND on Bottom (solid, remove dead copper, pour order 2): -0.09,-1.35 -0.09,1751.6 1614.09,1751.6 1614.09,-1.35
GND on Inner3 (solid, remove dead copper, pour order 3): -0.09,0.31 -0.09,1750.64 1614.09,1750.64 1614.09,0.31

## Keep-outs
Keep-Out Layer:
  the board outline again, w1

## Other copper
Top:
  region net GND: 742.6,1340.6 742.6,1257.6 711.6,1257.6 711.6,1340.6 742.6,1340.6
  region net GND: 1364.56,170.94 1384.56,190.94 1397.56,190.94 1417.56,170.94 1457.56,170.94 1457.56,111.94 1364.56,111.94 1364.56,170.94
  region net GND: 668.6,1339.6 668.6,1256.6 637.6,1256.6 637.6,1339.6 668.6,1339.6
  text "TOP WIRE" at 2200,700 h50
Inner2:
  text "INNER LAYER 2" at 2200,600 h50
Inner3:
  text "INNER LAYER 3" at 2900,500 h50
Bottom:
  region net GND: 772.56,538.08 772.56,436.94 882.06,436.94 887.06,437.6 887.06,538.08 772.56,538.08
  region net GND: 1364.56,170.94 1384.56,190.94 1397.56,190.94 1417.56,170.94 1457.56,170.94 1457.56,111.94 1364.56,111.94 1364.56,170.94
  text "BOTTOM WIRE" at 2900,400 h50

## Silkscreen, mask and mechanical layers (free items; w line width, h text height)
Silkscreen Top:
  lines w7: 509.2,349.28 509.2,1238 1085,1238 1085,349.28 509.2,349.28
  text "EZRadioPRO" at 927.99,1567.96 h40
  text "TOP SILKSCREEN" at 2200,1000 h50
  text "VPP" at 74.99,174.96 h25
  text "ESDA" at 249.99,174.96 h25
  text "GP1" at 474.99,174.96 h25
  text "SCLK" at 674.99,174.96 h25
  text "MOSI" at 874.99,174.96 h25
  text "GP2" at 1074.99,174.96 h25
  text "SDN" at 1274.99,174.96 h25
  text "VDD" at 1474.99,174.96 h25
  text "ESCL" at 174.99,124.96 h25
  text "GP0" at 374.99,124.96 h25
  text "NIRQ" at 574.99,124.96 h25
  text "MISO" at 774.99,124.96 h25
  text "NSEL" at 974.99,124.96 h25
  text "GP3" at 1174.99,124.96 h25
  text "GND" at 1374.99,124.96 h25
Silkscreen Bottom:
  drawing of 1333 lines, arcs and shapes, not listed
  text "WES0012-02" at 1533.99,1371.96 h50
  text "R" at 596.99,1360.96 h25
  text "RF EBID" at 217.92,1228.04 h25
  text "BOTTOM SILKSCREEN" at 2900,100 h50
Paste Mask Top:
  text "TOP PASTE" at 2200,900 h50
Paste Mask Bottom:
  text "BOTTOM PASTE" at 2900,200 h50
Solder Mask Top:
  text "TOP SOLDERMASK" at 2200,800 h50
Solder Mask Bottom:
  text "BOTTOM SOLDERMASK" at 2900,300 h50
Assembly Drawing Top:
  text "TOP ASSEMBLY" at 2200,1100 h50
Assembly Drawing Bottom:
  text "BOTTOM ASSEMBLY" at 2900,0 h50
Drill Drawing:
  lines w1: 1614.09,1926.99 1614.11,1926.99 ; -0.09,-0.12 -0.06,-0.12 ; -0.09,1751.85 -0.06,1751.85 ; -0.09,1907.31 -0.06,1907.31
  lines w10: -235.05,-0.12 -50.09,-0.12 ; -235.05,1751.85 -50.09,1751.85 ; -185.05,820.31 -185.05,-0.12 ; -185.05,955.31 -185.05,1751.85 ; -0.09,1765.11 -0.09,1857.31 ; 604.27,1815.11 -0.09,1815.11 ; 1009.73,1815.11 1614.09,1815.11 ; 1614.09,1765.11 1614.09,1876.99 ; -185.05,-0.12 -160.05,99.88 -210.05,99.88 -185.05,-0.12 ; -185.05,1751.85 -210.05,1651.85 -160.05,1651.85 -185.05,1751.85 ; -0.09,1815.11 99.91,1790.11 99.91,1840.11 -0.09,1815.11 ; 1614.09,1815.11 1514.09,1840.11 1514.09,1790.11 1614.09,1815.11
  text "41.00mm" at 634.27,1777.61 h50
  text "44.50mm" at -405.05,850.31 h50